# EAGLE board Adafruit protrinket backpack (EAGLE 6.3)
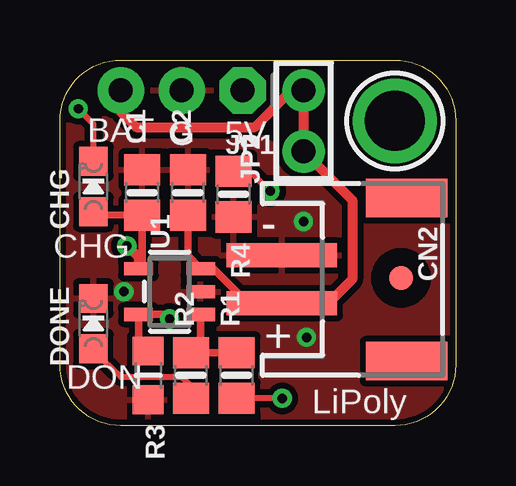
[diagram p0: board, top side]
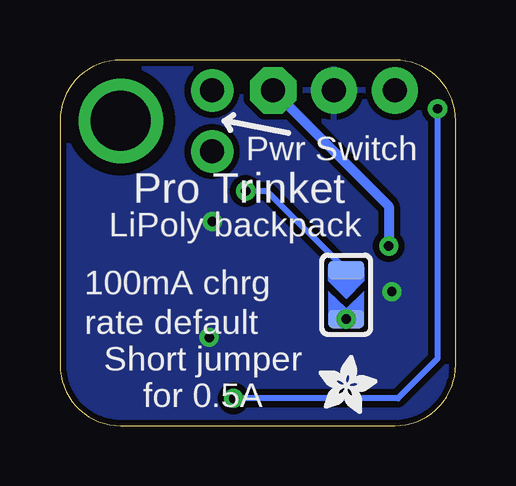
[diagram p1: board, bottom side, seen from below]

Size 16.51 x 15.24 mm. Coordinates in mm from the lower left corner, seen from the top.
Outline: 16.51,12.7 16.51,2.54 arc-90 13.97,0 2.54,0 arc-90 0,2.54 0,12.7 arc-90 2.54,15.24 13.97,15.24 arc-90 16.51,12.7
Copper layers (1*16): Top 0.035mm / dielectric 1.5mm / Bottom 0.035mm
Design rules "adafruit": minimum track width 8mil, minimum drill 15.5mil, track to track 8mil, track to pad 8mil, pad to pad 8mil, via to via 8mil, smd to smd 8mil, copper to edge 10mil, drill to drill 8mil, minimum pad ring 10mil, minimum via ring 8mil, stop-mask expansion 2mil, vias tented up to drill 20mil, thermal gap 10mil
tRestrict: area 9,12.2 to 9.1,12.6

## Footprints (pad centres in the part's own frame; a part is rotated, then mirrored left to right if it is on the bottom)
0805-NO = smd 1.3 x 1.5: 1 -0.95,0; 2 0.95,0
CHIPLED_0805_NOOUTLINE = smd 1.2 x 1.2: A 0,-1.05; C 0,1.05
JSTPH2 = smd 1 x 4.6: 1 -1,-3.7; 2 1,-3.7 | smd 1.6 x 3.4: NC1 -3.4,1.5; NC2 3.4,1.5
FIDUCIAL_1MM = smd 1 x 1: 1 0,0
1X03_ROUND_76 = drill 1 pad 1.93 octagon: 1 -2.54,0 | drill 1 pad 1.93: 2 0,0; 3 2.54,0
1X02_ROUND = drill 1 pad 1.778: 1 -1.27,0; 2 1.27,0
_0805MP = smd 1.2 x 1.3: 1 -1.016,0; 2 1.016,0
SOLDERJUMPER_ARROW_NOPASTE = smd 0.762 x 1.524: 1 -1.016,0; 2 1.016,0
SOT23-5 = smd 0.55 x 1.2: 1 -0.95,-1.3; 2 0,-1.3; 3 0.95,-1.3; 4 0.95,1.3; 5 -0.95,1.3
MOUNTINGHOLE_2.5_PLATED = drill 2.5 pad 3.2: P$1 0,0

## Placement (x,y rotation side)
C1  10µF  [0805-NO]  3.43,9.72 90 top
C2  10µF  [0805-NO]  5.33,9.72 90 top
CHG  RED  [CHIPLED_0805_NOOUTLINE]  1.4,9.97 0 top
CN2  JSTPH  [JSTPH2]  12.95,6.1 270 top
DONE  GREEN  [CHIPLED_0805_NOOUTLINE]  1.4,4.25 0 top
FID1  FIDUCIAL""  [FIDUCIAL_1MM]  14.22,6.16 0 top
JP1  [1X03_ROUND_76]  5.08,13.97 180 top
JP2  [1X02_ROUND]  10.16,12.7 90 top
R1  1K  [0805-NO]  7.37,2.1 90 top
R2  1K  [0805-NO]  5.46,2.1 90 top
R3  10K\  [_0805MP]  3.68,2.1 270 top
R4  2.5K  [0805-NO]  7.24,9.65 270 top
SJ1  [SOLDERJUMPER_ARROW_NOPASTE]  4.57,5.46 270 bottom
U1  MCP73831T-2ACI/OT  [SOT23-5]  4.57,5.59 90 top
U$9  [ADAFRUIT_2.5MM]  5.71,0.51 0 bottom
U$10  MOUNTINGHOLE2.5  [MOUNTINGHOLE_2.5_PLATED]  13.97,12.7 0 top

## Library data of the parts
C1 C2 CHG CN2 DONE JP1 JP2 R1-R3 U1 U$9 = microbuilder
FID1 SJ1 U$10 = microbuilder; BOM: EXCLUDE
R4 = microbuilder; AUTHOR: K. TOWNSEND

## Nets
GND: C1.2 C2.2 CN2.1 DONE.C JP1.2 R3.2 R4.2 U1.2
N$1: CHG.C R1.1
N$2: R1.2 R2.2 U1.1
N$3: R4.1 SJ1.1
N$5: R3.1 SJ1.2 U1.5
N$6: DONE.A R2.1
VBAT: C2.1 CN2.2 JP1.3 JP2.1 JP2.2 U1.3
VBUS: C1.1 CHG.A JP1.1 U1.4

## Tracks (layer width: path | path; a pad name or v marks a point on that pad's centre or on a via)
GND  (via drill 0.39)
  other vias: 10.16,8.51 2.67,5.59 10.29,3.68
  pour Top (isolate 0.254): -0.13,-0.06 0,15.3 16.38,15.18 16.51,-0.06
  pour Bottom (isolate 0.254): 0,15.11 16.38,15.11 16.51,0 0,0
N$1  (via drill 0.39)
  Top 0.254: CHG.C 1.4,12.57 v0.76,13.21 | v9.27,1.14 v9.27,1.15 R1.1
  Bottom 0.254: v0.76,13.21 0.76,2.79 2.41,1.14 v9.27,1.14
N$2
  Top 0.305: U1.1 5.87,3.46 R2.2 R1.2
N$3  (via drill 0.39)
  Top 0.254: v8.76,9.78 7.93,10.6 R4.1
  Bottom 0.254: SJ1.1 7.87,9.78 v8.76,9.78
N$5  (via drill 0.39)
  Top 0.305: R3.1 3.27,3.33 U1.5 4.38,4.64 SJ1.2
  Bottom 0.305: 4.57,4.32 SJ1.2
  other vias: 4.57,4.45
N$6
  Top 0.254: DONE.A 1.43,3.08 2.54,2.03 5.08,2.03 5.46,1.65 R2.1
VBAT
  Top 0.305: 9.78,5.08 9.46,5.4 7.56,5.4 6.42,6.54 U1.3 5.33,7.08 C2.1
  Top 0.406: 9.37,5.21 CN2.2 | 9.46,5.4 9.25,5.19 CN2.2 | CN2.2 11.19,5.1 12.19,6.1 12.19,9.4 JP2.1 JP2.2 | JP1.3 2.54,13.08 3.17,12.45 8.13,12.45 9.65,13.97 JP2.2 | 10.16,13.59 JP2.2
VBUS  (via drill 0.39)
  Top 0.305: CHG.A 1.37,8.79 C1.1 3.43,6.7 U1.4
  Top 0.406: v2.79,7.49 3.27,7.01 U1.4
  Bottom 0.406: JP1.1 2.79,9.14 v2.79,7.49

## Text on the board
tPlace: BAT | G | 5V | CHG | - | + | DON | LiPoly
bPlace: Pwr Switch | Pro Trinket | LiPoly backpack | 100mA chrg | rate default | Short jumper / for 0.5A